# Altium PCB PCB2.PcbDoc
Units mm, origin at the board's own origin, x right, y up, seen from the top; angles counter-clockwise.
Board outline 86.99 x 71.88 mm, 2 copper layers (Top Layer, Bottom Layer); 12 components, 9 nets, 59 pads, 1 vias.
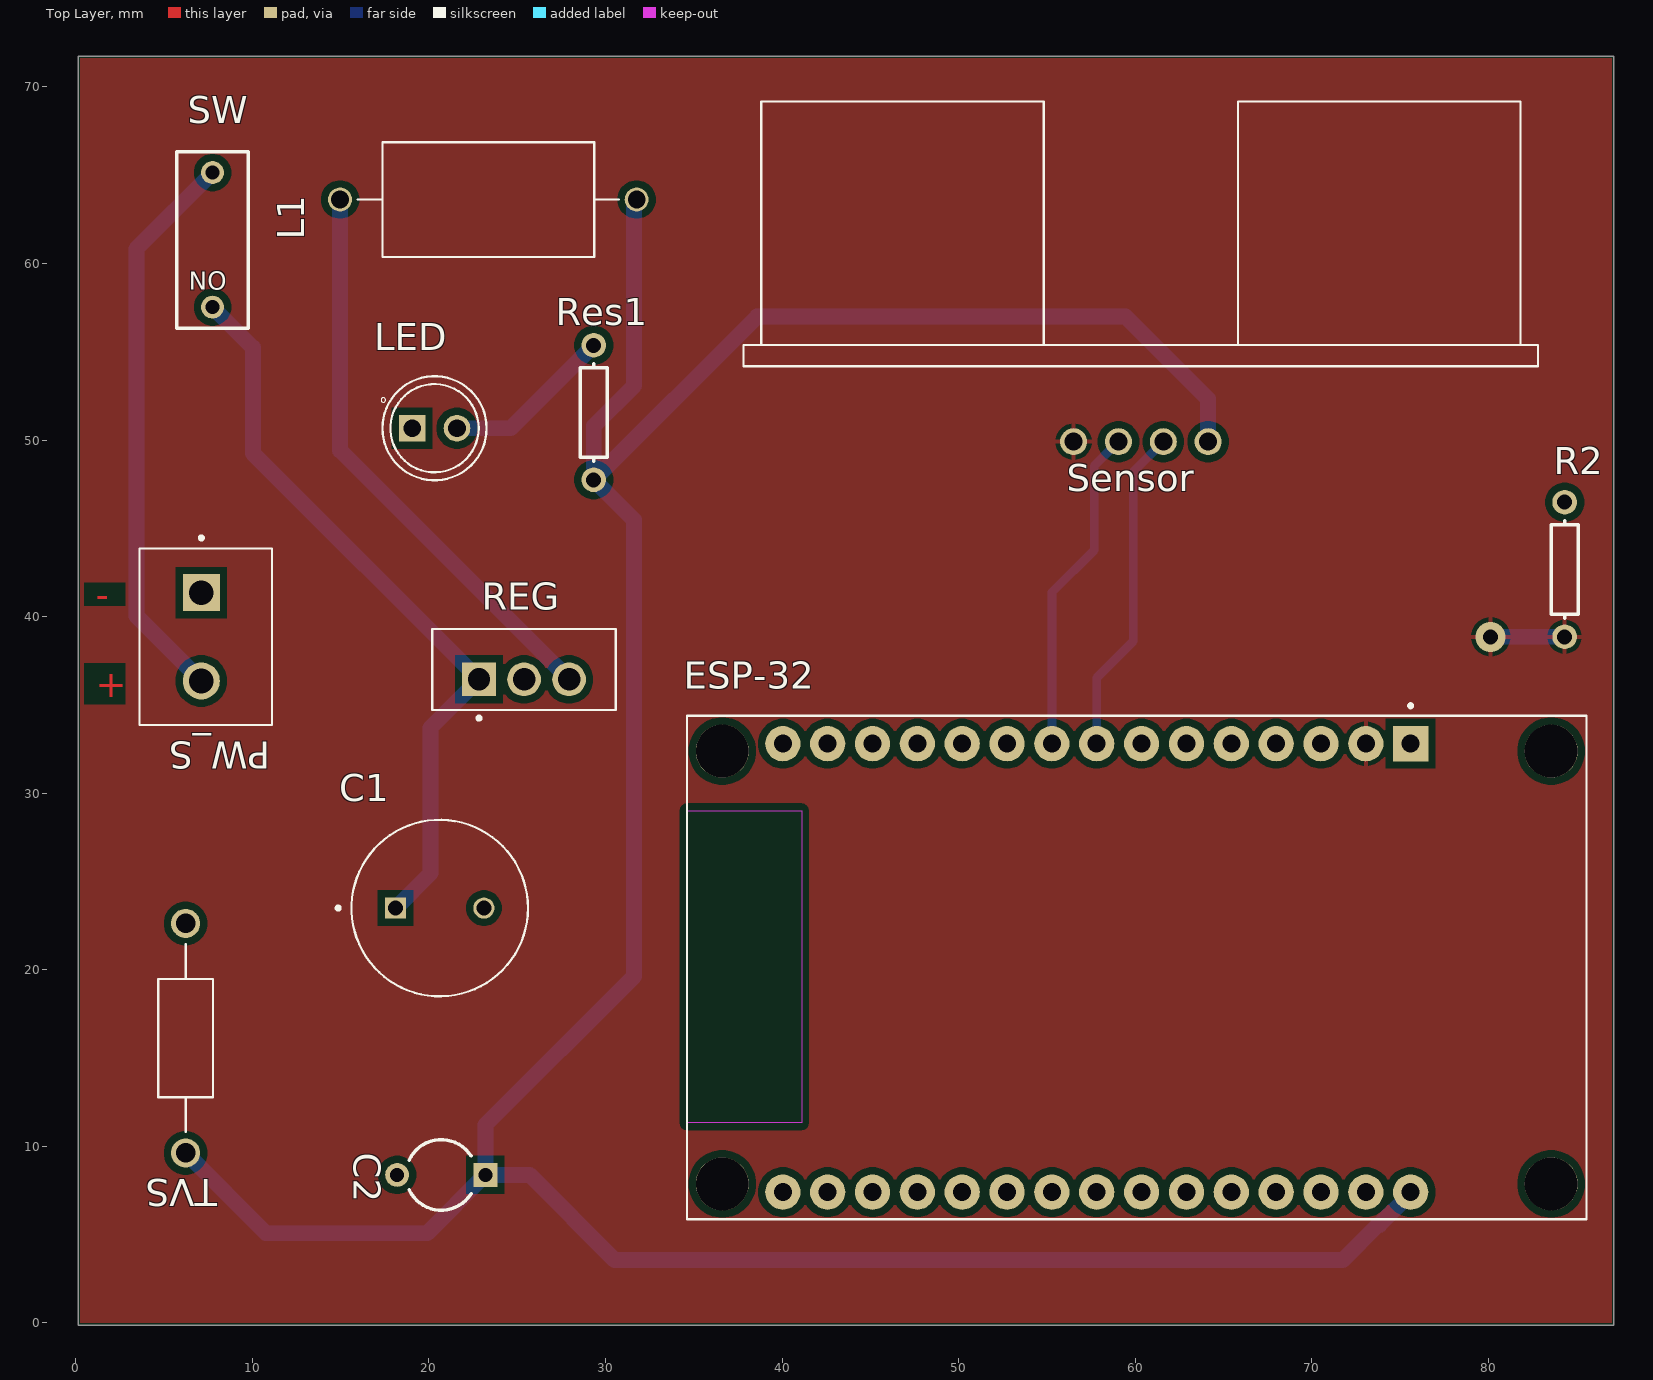
[diagram p0: Top Layer view]
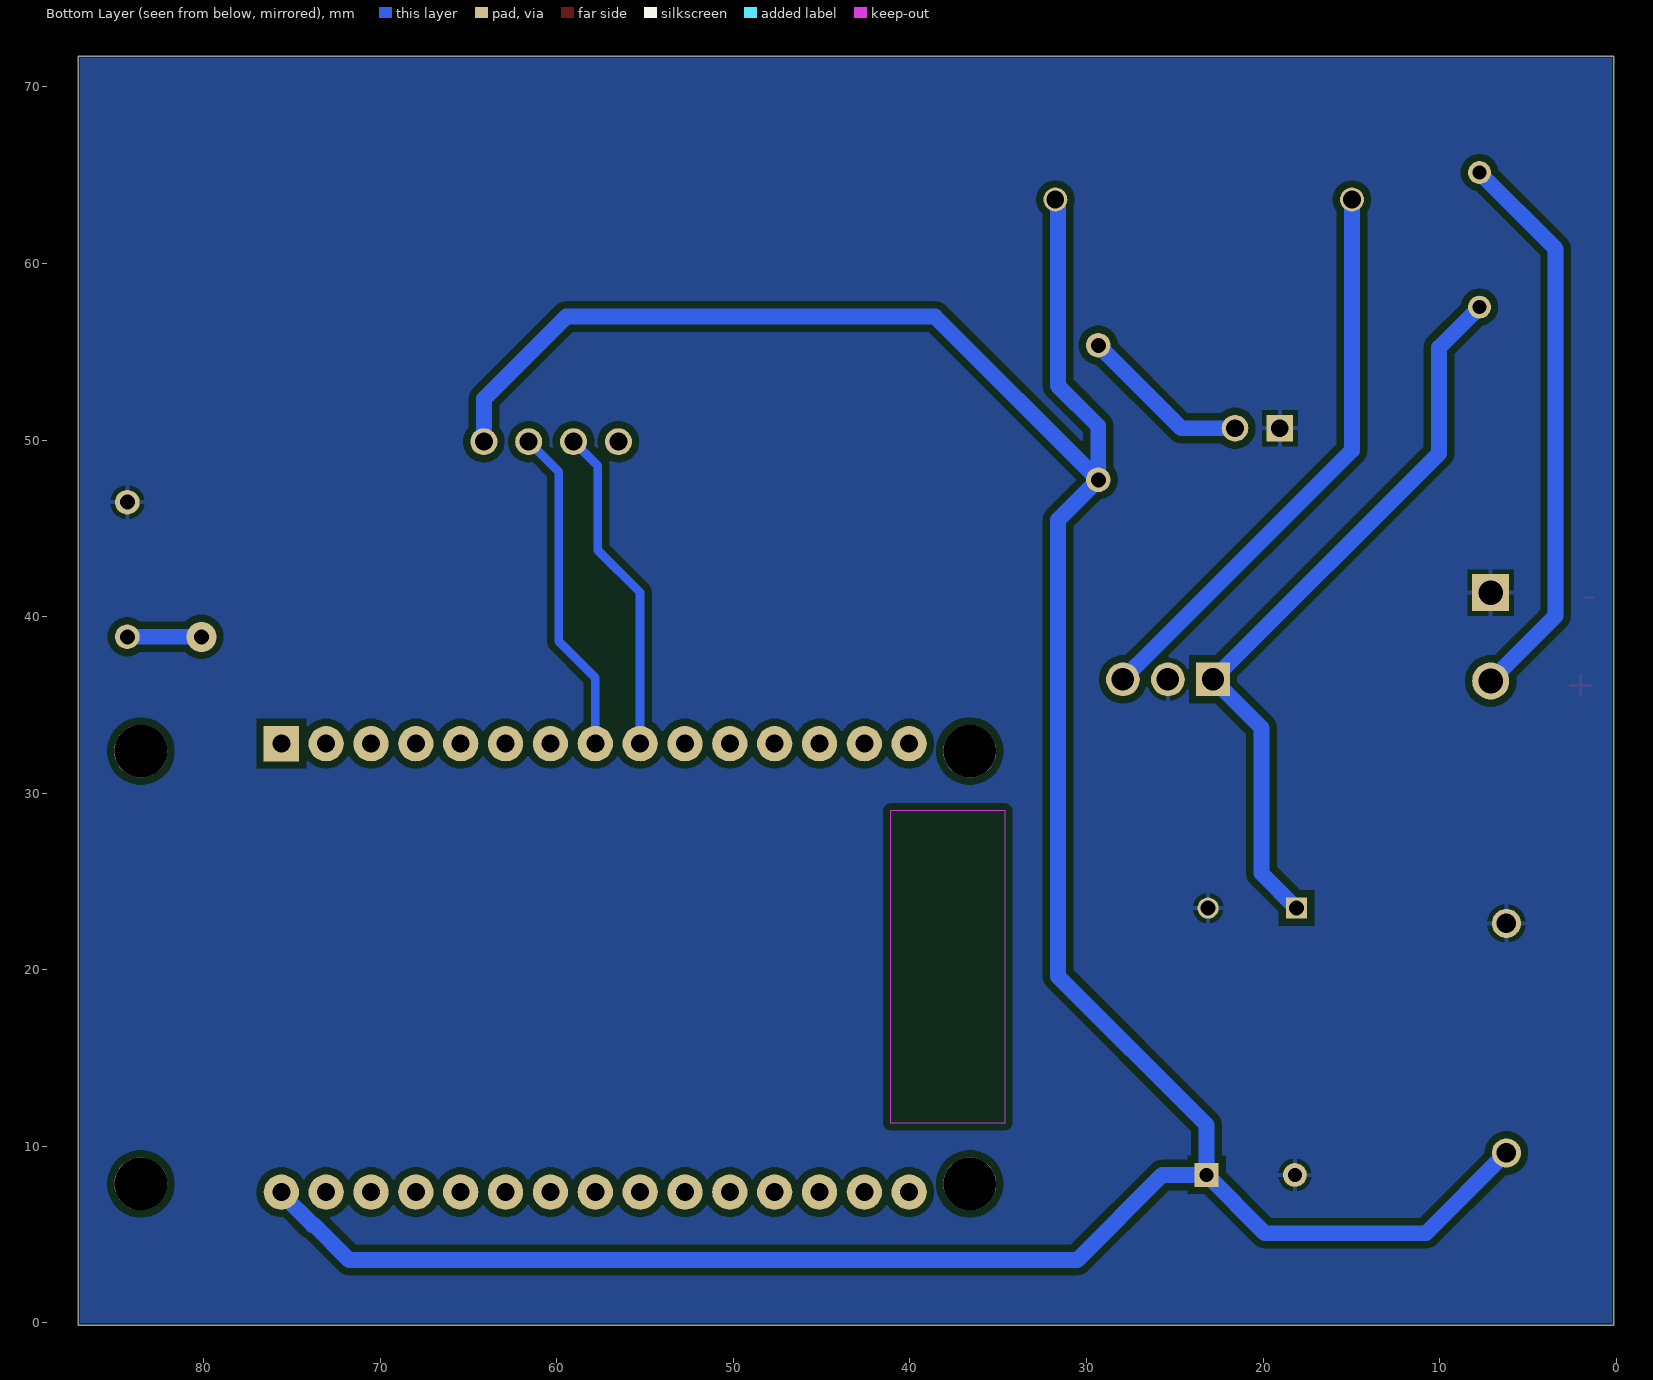
[diagram p1: Bottom Layer view, seen from below]
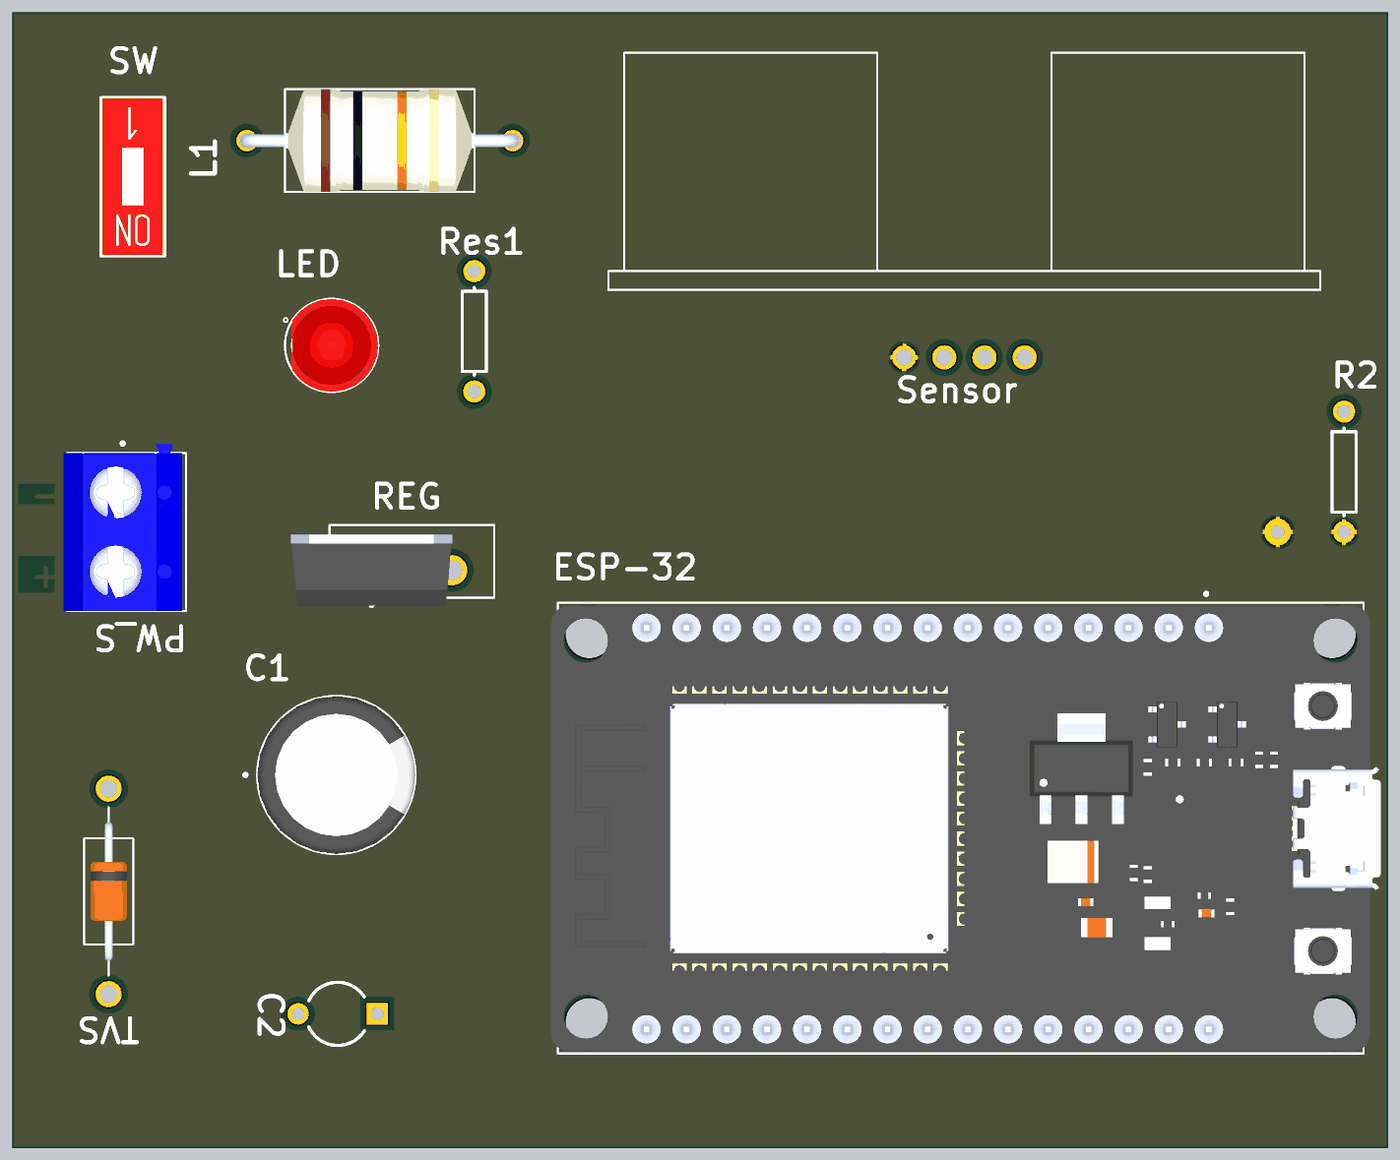
[diagram p2: 3D render of the assembled board from above, using the file's embedded part models]

## Layer stack, top to bottom
Top Solder: solder mask 0.0102, Solder Resist, Dk 3.5
Top Layer: signal copper 0.0356
Dielectric 1: dielectric 0.32, FR-4, Dk 4.8
Bottom Layer: signal copper 0.0356
Bottom Solder: solder mask 0.0102, Solder Resist, Dk 3.5

## Board outline
0.127,-0.127 0.127,71.755 87.122,71.755 87.122,-0.127

## Design rules (kind name [scope] priority, off if disabled: settings)
Clearance [All] p1: gap=0.4 ignorepadtopadclearanceinfootprint=FALSE
HoleSize [All] p1: absolutevalues=TRUE maxlimit=3 minlimit=0.025 maxpercent=80.000 minpercent=20.000
PolygonConnect [All] p1: connectstyle=Relief reliefconductorwidth=0.254 reliefentries=4 polygonreliefangle="90 Angle" airgapwidth=0.254
RoutingVias [All] p1: holewidth=0.65 width=1.5 viastyle="Through Hole" minholewidth=0.6 minwidth=1.4 maxholewidth=1.5 maxwidth=2
SilkToSolderMaskClearance [IsPad] p1: minsilkscreentomaskgap=0.1 clearancetoexposedcopper=FALSE
SolderMaskExpansion [All] p1: expansion=0.102 istentingtop=FALSE
Width Width_2 [InNet('sig echo')] p1: maxlimit=0.5 minlimit=0.5 preferedwidth=0.5
Width [InNet('sig_trig')] p2: maxlimit=0.5 minlimit=0.5 preferedwidth=0.5
Width Width_1 [All] p3: maxlimit=0.9 minlimit=0.9 preferedwidth=0.9
28 further rules are at their usual default settings.

## Components (designator, comment, footprint, x,y, rotation, side; value= is the part's Value field where it differs from the comment)
C1 "ECEA1HN101U" CAPPRD500W60D1000H2000 20.614,23.495 r0 top
C2 "Cap2" CAPR5-4X5 20.701,8.382 r180 top value=0.1uF
ESP-32 "ESP32-DEVKIT-V1" MODULE_ESP32_DEVKIT_V1 60.091,20.105 r270 top
L1 "B82145A1105J000" INDAD1680W80L1200D650 23.368,63.627 r0 top
LED "WP7113ID" LED_WP7113ID 20.32,50.673 r0 top
PW_S "KF301-2P" HANDSON_KF301-2P 7.112,38.862 r270 top
R2 "Res1" AXIAL-0.3 84.328,42.672 r270 top value=1K
REG "L7805CV" TO255P1040X460X1968-3 22.84,36.449 r0 top
Res1 "Res1" AXIAL-0.3 29.337,51.562 r90 top value=1K
Sensor "HC-SR04" XCVR_HC-SR04 60.325,49.911 r180 top
SW "418117170901" 418117170901 7.747,61.341 r180 top
TVS "P6KE68CA" DIOAD1300W80L670D310 6.223,16.129 r270 top

## Footprints (in the part's own frame and the unit in brackets; to place one, negate y for a bottom-side part, rotate by r counter-clockwise, add the part's x,y. Pads: shape width x height; smd on the part's side, far side on the other; paste and mask are expansions set on the pad)
418117170901 [mm] "2.54 mm compact THT with flat actuator, 1p"
  round 1.3 hole 0.8: 1(0,-3.81) 2(0,3.81)
  silkscreen extent -2.02,-5 2.02,5, body extent -1.92,-4.95 1.92,4.95, height 5.75
AXIAL-0.3 [mm] "Axial Device, Thru-Hole; 2 Leads; 0.3 in Pin Spacing"
  round 1.4 hole 0.85: 1(-3.81,0) 2(3.81,0)
  silkscreen extent -2.77,-0.76 2.77,0.76
CAPPRD500W60D1000H2000 [mm]
  round 1.2 hole 0.85: N(2.5,0)
  rect 1.2x1.2 / inner round 1.2 / far side rect 1.2x1.2 hole 0.85: P(-2.5,0)
  silkscreen extent -5.85,-5 5,5, body extent -5,-5 5,5, height 20
CAPR5-4X5 [mm] "Capacitor; 2 Leads"
  rect 1.35x1.35 hole 0.8: 1(-2.5,0)
  round 1.35 hole 0.8: 2(2.5,0)
  silkscreen extent -1.69,-2 1.82,2
DIOAD1300W80L670D310 [mm]
  round 1.65 hole 1.1: 1(-6.5,0) 2(6.5,0)
  silkscreen extent -5.32,-1.55 5.32,1.55, body extent -4.4,-1.14 4.4,1.14, height 2.29
HANDSON_KF301-2P [mm]
  rect 2.1x2.1 / inner round 2.1 / far side rect 2.1x2.1 hole 1.4: 1(-2.5,0)
  round 2.1 hole 1.4: 2(2.5,0)
  silkscreen extent -5.7,-3.5 5,4, body extent -5.6,-3.75 5,3.75, height 10
INDAD1680W80L1200D650 [mm]
  round 1.35 hole 1: 1(-8.4,0) 2(8.4,0)
  silkscreen extent -7.41,-3.25 7.41,3.25, body extent -8.8,-3.25 8.8,3.25, height 6.5
LED_WP7113ID [mm]
  round 1.508 hole 1: A(1.27,0)
  rect 1.508x1.508 / inner round 1.508 / far side rect 1.508x1.508 hole 1: C(-1.27,0)
  silkscreen extent -3.03,-2.95 2.95,2.95, body extent -2.5,-2.95 2.95,2.95, height 9.6
MODULE_ESP32_DEVKIT_V1 [mm]
  rect 2x2 / inner round 2 / far side rect 2x2 hole 1.02: 1(-12.7,15.515)
  round 2 hole 1.02: 2(-12.7,12.975) 3(-12.7,10.435) 4(-12.7,7.895) 5(-12.7,5.355) 6(-12.7,2.815) 7(-12.7,0.275) 8(-12.7,-2.265) 9(-12.7,-4.805) 10(-12.7,-7.345) 11(-12.7,-9.885) 12(-12.7,-12.425) 13(-12.7,-14.965) 14(-12.7,-17.505) 15(-12.7,-20.045) 16(12.7,-20.045) 17(12.7,-17.505) 18(12.7,-14.965) 19(12.7,-12.425) 20(12.7,-9.885) 21(12.7,-7.345) 22(12.7,-4.805) 23(12.7,-2.265) 24(12.7,0.275) 25(12.7,2.815) 26(12.7,5.355) 27(12.7,7.895) 28(12.7,10.435) 29(12.7,12.975) 30(12.7,15.515)
  round 3 hole 3 unplated: ""(-12.28,23.475) ""(-12.28,-23.475) ""(12.23,23.475) ""(12.23,-23.475)
  Keep-Out Layer region: 8.78,-25.475 -8.91,-25.475 -8.91,-18.985 8.78,-18.985
  Keep-Out Layer region: 8.78,-25.475 -8.91,-25.475 -8.91,-18.985 8.78,-18.985
  silkscreen extent -14.95,-25.48 14.23,25.47, body extent -14.1,-25.9 14.1,26.55, height 7.05
TO255P1040X460X1968-3 [mm]
  rect 1.91x1.91 / inner round 1.91 / far side rect 1.91x1.91 hole 1.27: 1(0,0)
  round 1.91 hole 1.27: 2(2.55,0) 3(5.1,0)
  silkscreen extent -2.65,-2.29 7.75,2.86, body extent -5.1,-2.25 5.1,2.25, height 19.68
XCVR_HC-SR04 [mm]
  round 1.53 hole 1.02: 1(-3.81,0) 2(-1.27,0) 3(1.27,0) 4(3.81,0)
  silkscreen extent -22.5,-19.27 22.5,-4.27

## Part data
C1: "Capacitor [Panasonic Automotive & Industrial Systems] ECEA1HN101U Capacitor", Package="RADIAL-2 Panasonic", Availability="In Stock", Check_prices=https://www.snapeda.com/parts/ECEA1HN101U/Panasonic/view-part/?ref=eda, MF=Panasonic, MP=ECEA1HN101U, Price=None, Purchase-URL=https://pricing.snapeda.com/search/part/ECEA1HN101U/?ref=eda, SnapEDA_Link=https://www.snapeda.com/parts/ECEA1HN101U/Panasonic/view-part/?ref=snap
C2: "Capacitor", PackageDescription="Capacitor; 2 Leads", PackageReference=CAPR5-4X5, Published=23-Sep-2002, Publisher="Altium Limited"
ESP-32: "Dual core, Wi-Fi: 2.4 GHz up to 150 Mbits/s,BLE (Bluetooth Low Energy) and legacy Bluetooth, 32 bits, Up to 240 MHz", Package=None, Check_prices=https://www.snapeda.com/parts/ESP32-DEVKIT-V1/Do+it/view-part/?ref=eda, MF="Do it", MP=ESP32-DEVKIT-V1, SnapEDA_Link=https://www.snapeda.com/parts/ESP32-DEVKIT-V1/Do+it/view-part/?ref=snap
L1: "FIXED IND 1MH 370MA 3.6 OHM TH", Package=None, Availability="In Stock", Check_prices=https://www.snapeda.com/parts/B82145A1105J000/TDK/view-part/?ref=eda, MF=TDK, MP=B82145A1105J000, Price=None, Purchase-URL=https://pricing.snapeda.com/search/part/B82145A1105J000/?ref=eda, SnapEDA_Link=https://www.snapeda.com/parts/B82145A1105J000/TDK/view-part/?ref=snap
LED: "Red 617nm LED Indication - Discrete 2V Radial", Package="Radial Kingbright", Availability="In Stock", Check_prices=https://www.snapeda.com/parts/WP7113ID/Kingbright/view-part/?ref=eda, MF=Kingbright, MP=WP7113ID, Price=None, Purchase-URL=https://pricing.snapeda.com/search/part/WP7113ID/?ref=eda, SnapEDA_Link=https://www.snapeda.com/parts/WP7113ID/Kingbright/view-part/?ref=snap
PW_S: "2 Pin Terminal Block 5mm Pitch", Package=None, Check_prices=https://www.snapeda.com/parts/KF301-2P/Handson+Technology/view-part/?ref=eda, MF="Handson Technology", MP=KF301-2P, SnapEDA_Link=https://www.snapeda.com/parts/KF301-2P/Handson+Technology/view-part/?ref=snap
R2 Res1: "Resistor", LatestRevisionDate=17-Jul-2002, LatestRevisionNote="Re-released for DXP Platform.", PackageDescription="Axial Device, Thru-Hole; 2 Leads; 0.3 in Pin Spacing", PackageReference=AXIAL-0.3, Published=8-Jun-2000, Publisher="Altium Limited"
REG: "Linear Voltage Regulator IC Positive Fixed 1 Output 1.5A TO-220", Package="TO-220-3 STMicroelectronics", Check_prices=https://www.snapeda.com/parts/L7805CV/STMicroelectronics/view-part/?ref=eda, MF=STMicroelectronics, MP=L7805CV, SnapEDA_Link=https://www.snapeda.com/parts/L7805CV/STMicroelectronics/view-part/?ref=snap
Sensor: "Ultrasonic Sensor Module", Package=None, Availability=Unavailable, MP=HC-SR04, Price=None
SW: "WS-DITV Compact THT Dip Switch, Flat Actuator, pitch 2.54mm, 1p", Manufacturer="Wurth Elektronik", Operating Temperature Max=85°C, Operating Temperature Min=-40°C, Rated Current Non-Switching=100mA, Rated Current Switching=25mA, Rated Voltage Non-Switching=50VDC, Rated Voltage Switching=24VDC, Actuator Type="Flat Type", Category="Dip Switches", ComponentLink1Description="Website Link", ComponentLink1URL=https://www.we-online.com/redexpert/article/418117170901?ad, ComponentLink2Description="Datasheet Link", ComponentLink2URL=https://www.we-online.com/redexpert/spec/418117170901?ad, Contact Material="Copper Alloy", Contact Plating=Gold, Manufacturer Part Number=418117170901, Match Code=WS-DITV, Mount="Through Hole", Number of Poles=1, Operation Force=800g, Packaging=Tube, Pitch=2.54mm
TVS: Package=None, Availability=Unavailable, MP=P6KE68CA, Price=None

## Via types
v1: diameter 1.7, hole 0.85, Top Layer to Bottom Layer, 1 vias

## Nets (pads, with @x,y where several pads share a name; then routed paths per layer and width w, separated by ;. In a path a pad name is that pad's centre, name@x,y a point inside that pad or via, vN(x,y) a via of type N, cw(c..) or ccw(c..) an arc to the next point about the centre after c; other vN are vias at no path point)
DGND: ESP-32.2 R2.2 Sensor.4 | length 4.6
  Top Layer w0.9: ESP-32.2@72.771,33.1 ESP-32.2
  Bottom Layer w0.9: v1(80.137,38.862) R2.2
GND: C1.N C2.2 LED.C PW_S.1 R2.1 REG.2 TVS.1
NetC1_P: C1.P REG.1 SW.2 | length 42.2
  Bottom Layer w0.9: SW.2 10.033,55.245 10.033,49.256 REG.1 20.091,33.7 20.091,25.472 C1.P
NetL1_1: L1.1 REG.3 | length 32.6
  Bottom Layer w0.9: L1.1 14.968,49.421 26.135,38.254 26.138,38.254 27.94,36.452 REG.3
NetLED_A: LED.A Res1.2 | length 9.7
  Bottom Layer w0.9: LED.A 24.638,50.673 Res1.2
NetPW_S_2: PW_S.2 SW.1 | length 32.1
  Bottom Layer w0.9: PW_S.2 3.429,40.045 3.429,60.833 SW.1
"sig echo": ESP-32.9 Sensor.3 | length 18.7
  Bottom Layer w0.5: ESP-32.9 55.286,41.367 57.683,43.764 57.683,48.539 Sensor.3
sig_trig: ESP-32.8 Sensor.2 | length 18.7
  Bottom Layer w0.5: ESP-32.8 57.826,36.541 59.893,38.608 59.893,48.209 Sensor.2
Vin-5V: C2.1 ESP-32.30 L1.2 Res1.1 Sensor.1 TVS.2 | length 179.9
  Bottom Layer w0.9: TVS.2 10.772,5.08 19.899,5.08 C2.1 ; L1.2 31.682,63.541 31.682,63.223 31.623,63.164 31.623,53.086 29.337,50.8 Res1.1 ; Sensor.1 64.135,52.324 59.461,56.998 38.583,56.998 Res1.1 ; ESP-32.30 75.606,7.329 73.832,5.555 73.756,5.555 71.757,3.556 30.531,3.556 25.705,8.382 C2.1 ; C2.1 23.201,11.212 31.623,19.634 31.623,45.466 Res1.1
pads on no net: ESP-32. ESP-32.1 ESP-32.3 ESP-32.4 ESP-32.5 ESP-32.6 ESP-32.7 ESP-32.10 ESP-32.11 ESP-32.12 ESP-32.13 ESP-32.14 ESP-32.15 ESP-32.16 ESP-32.17 ESP-32.18 ESP-32.19 ESP-32.20 ESP-32.21 ESP-32.22 ESP-32.23 ESP-32.24 ESP-32.25 ESP-32.26 ESP-32.27 ESP-32.28 ESP-32.29

## Polygon pours and split planes (outlines as drawn)
GND on Bottom Layer "GND_L02_P000" (solid, remove dead copper, pour order 0): 0.254,71.628 86.995,71.628 86.995,0 0.254,0
DGND on Top Layer "DGND_L01_P001" (solid, remove dead copper, pour order 1): 0.254,71.628 86.995,71.628 86.995,0 0.254,0

## Other copper
Top Layer:
  text "-" at 1.143,40.513 h1.52
  text "+" at 1.143,35.433 h1.52

## Text inside footprints (layer, text, board x,y; h text height)
SW: Top Overlay "ON" at 8.547,59.541 h1.02 r180; Top Component Outline "ON" at 8.547,59.541 h1.02 r180; Top Component Outline "1" at 7.977,64.141 h1.02 r180